# Altium PCB circuit board design v2.1.PcbDoc
Units mm, origin at the board's own origin, x right, y up, seen from the top; angles counter-clockwise.
Board outline 28.07 x 76.07 mm, 4 copper layers (F.Cu, In1.Cu, In2.Cu, B.Cu); 64 components, 83 nets, 279 pads, 132 vias.
Unrouted connection lines stored in the file: 2.
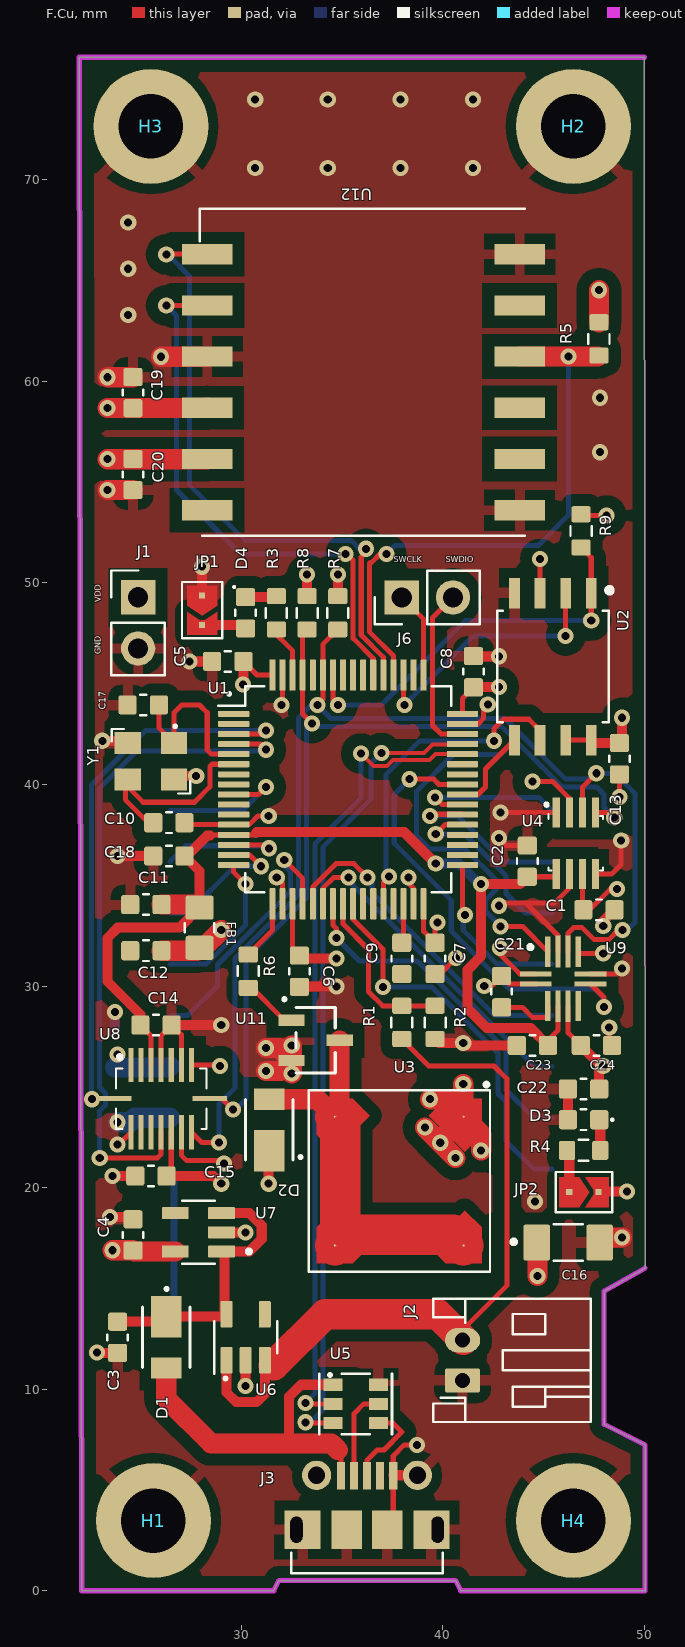
[diagram p0: F.Cu view]
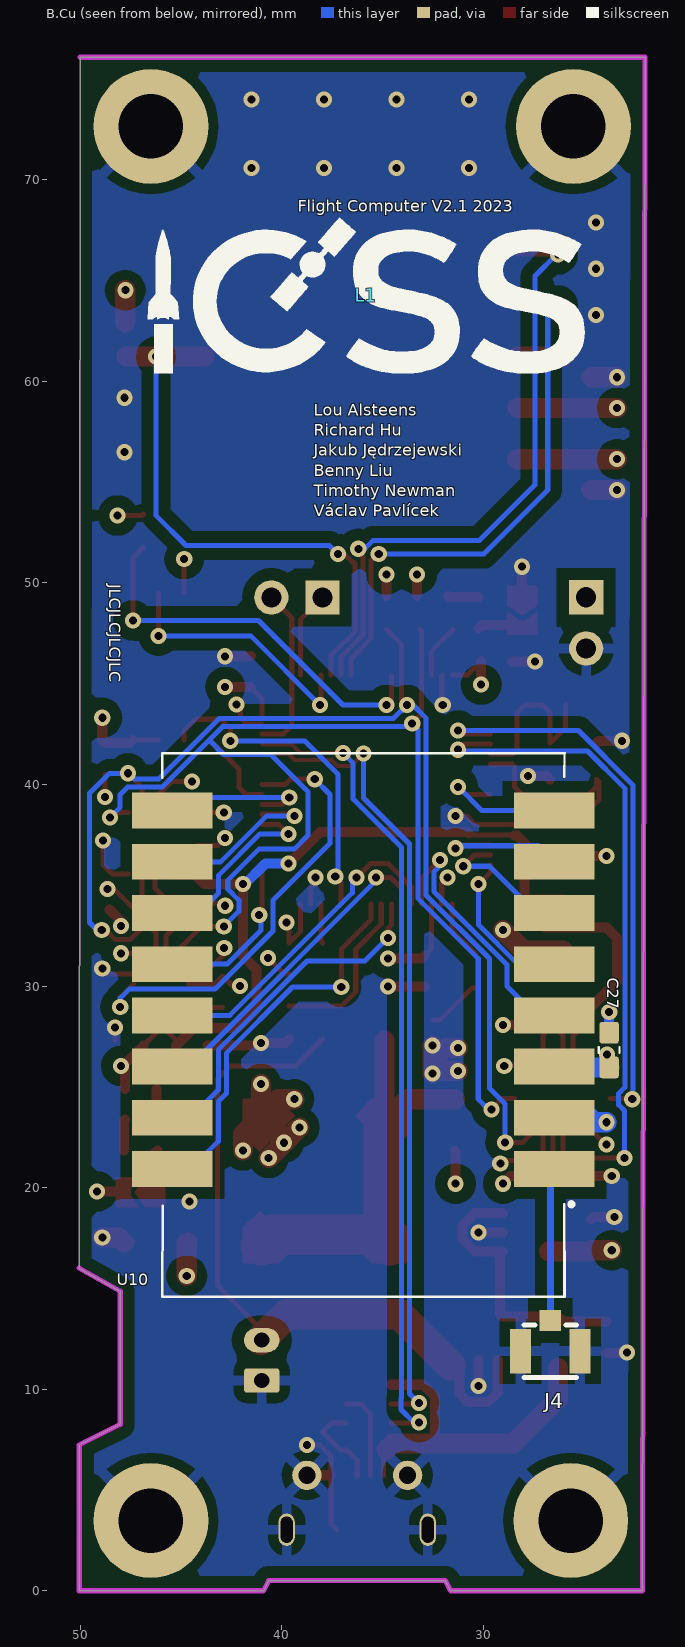
[diagram p1: B.Cu view, seen from below]
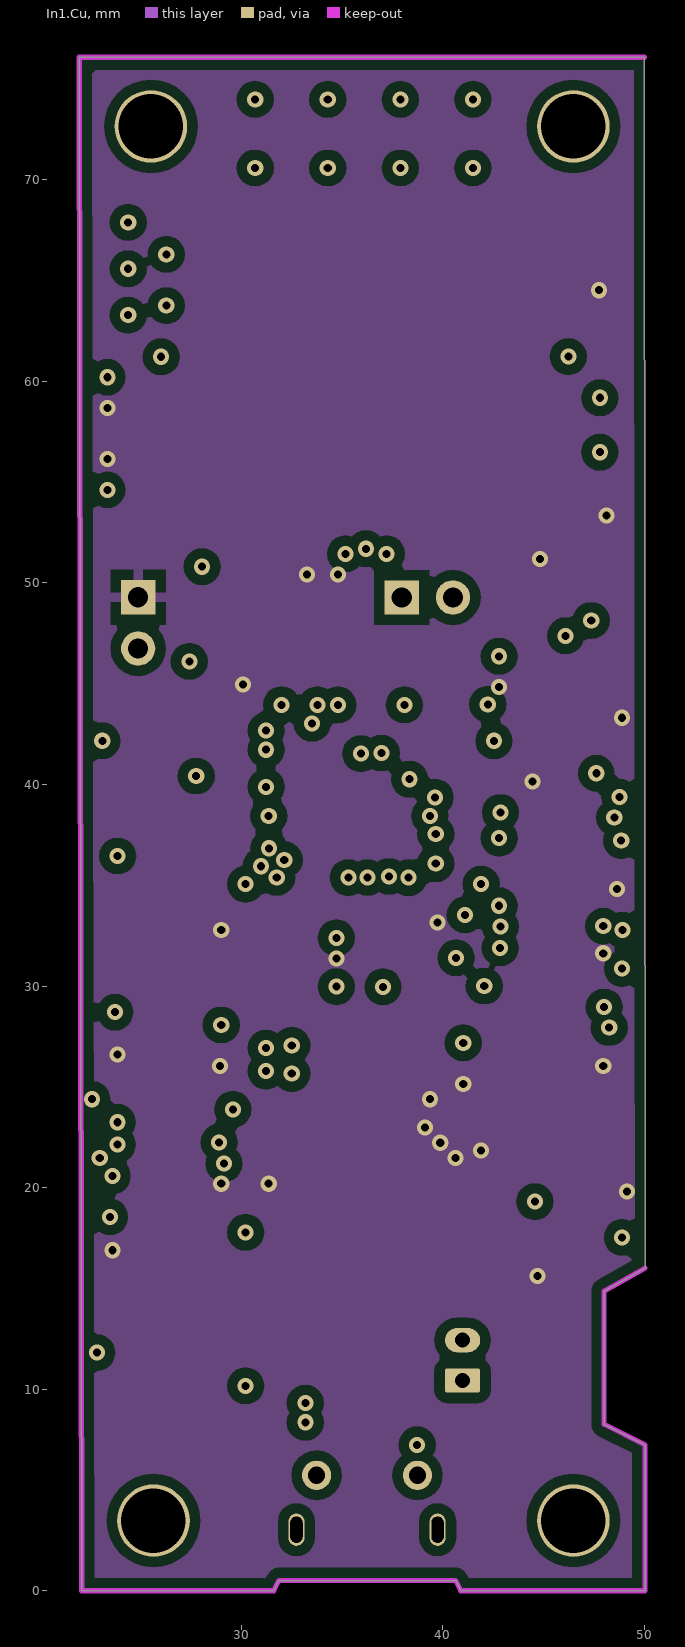
[diagram p2: In1.Cu]
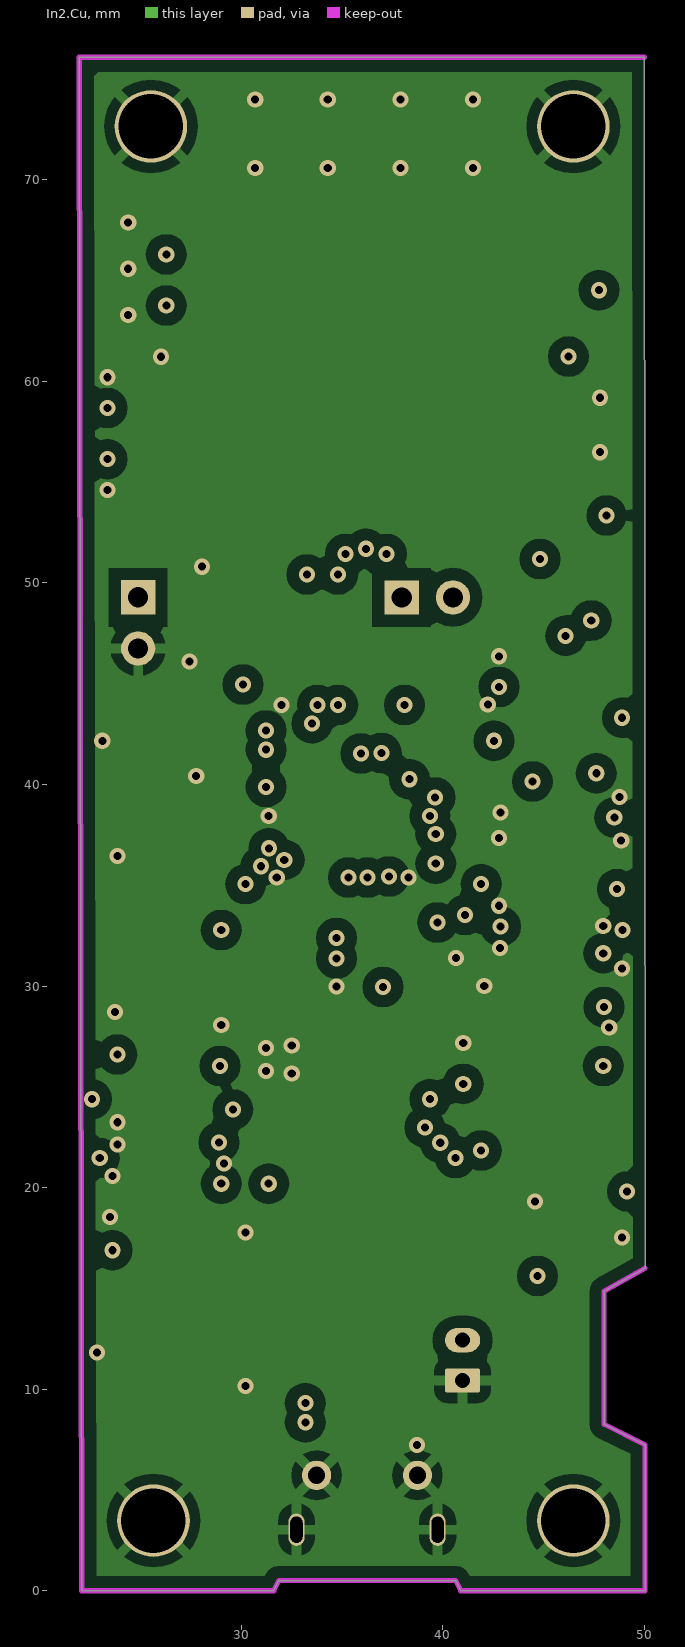
[diagram p3: In2.Cu]

## Layer stack, top to bottom
F.Mask: solder mask 0.0102, Solder Resist, Dk 3.5
F.Cu: signal copper 0.0356
Dielectric 1: dielectric 0.32, FR-4, Dk 4.8
In1.Cu: signal copper 0.0356
Dielectric2: dielectric 0.32, FR-4, Dk 4.8
In2.Cu: signal copper 0.0356
Dielectric3: dielectric 0.32, FR-4, Dk 4.8
B.Cu: signal copper 0.0356
B.Mask: solder mask 0.0102, Solder Resist, Dk 3.5

## Board outline
50.038,16.002 48.006,14.859 48.006,8.255 50.038,7.239 50.038,0 40.894,0 40.64,0.508 31.877,0.508 31.623,0 22.098,0 21.971,76.073 50,76.073 50.038,16.002

## Design rules (kind name [scope] priority, off if disabled: settings)
Clearance "Clearence 0.6_Polygon" [InNamedPolygon('F.Cu-GND') OR InNamedPolygon('In2.Cu-GND') OR InNamedPolygon('B.Cu-GND')] p1: gap=0.6 ignorepadtopadclearanceinfootprint=FALSE
Clearance "Clearence 0.508_Polygon" [InNamedPolygon('In1.Cu-+3.3V')] p2: gap=0.508 ignorepadtopadclearanceinfootprint=FALSE
MinimumSolderMaskSliver [All] p1: minsoldermaskwidth=0
PolygonConnect Polygon_In1.Cu-+3.3V_ConnectDirect [IsNamedPolygon('In1.Cu-+3.3V') vs IsVia] p1: connectstyle=Direct reliefconductorwidth=0.254 reliefentries=4 polygonreliefangle="90 Angle" airgapwidth=0.254
PolygonConnect Polygon_In1.Cu-+3.3V_ConnectRelief45 [IsNamedPolygon('In1.Cu-+3.3V') vs (IsThruPin or IsSMTPin) and (PadShape_AllLayers = 'Round')] p2: connectstyle=Relief reliefconductorwidth=0.508 reliefentries=4 polygonreliefangle="45 Angle" airgapwidth=0.508
PolygonConnect Polygon_In1.Cu-+3.3V_ConnectRelief90 [IsNamedPolygon('In1.Cu-+3.3V') vs (IsThruPin or IsSMTPin) and (PadShape_AllLayers <> 'Round')] p3: connectstyle=Relief reliefconductorwidth=0.508 reliefentries=4 polygonreliefangle="90 Angle" airgapwidth=0.508
PolygonConnect Polygon_B.Cu-GND_ConnectDirect [IsNamedPolygon('B.Cu-GND') vs IsVia] p4: connectstyle=Direct reliefconductorwidth=0.254 reliefentries=4 polygonreliefangle="90 Angle" airgapwidth=0.254
PolygonConnect Polygon_B.Cu-GND_ConnectRelief45 [IsNamedPolygon('B.Cu-GND') vs (IsThruPin or IsSMTPin) and (PadShape_AllLayers = 'Round')] p5: connectstyle=Relief reliefconductorwidth=0.508 reliefentries=4 polygonreliefangle="45 Angle" airgapwidth=0.508
PolygonConnect Polygon_B.Cu-GND_ConnectRelief90 [IsNamedPolygon('B.Cu-GND') vs (IsThruPin or IsSMTPin) and (PadShape_AllLayers <> 'Round')] p6: connectstyle=Relief reliefconductorwidth=0.508 reliefentries=4 polygonreliefangle="90 Angle" airgapwidth=0.508
PolygonConnect Polygon_In2.Cu-GND_ConnectDirect [IsNamedPolygon('In2.Cu-GND') vs IsVia] p7: connectstyle=Direct reliefconductorwidth=0.254 reliefentries=4 polygonreliefangle="90 Angle" airgapwidth=0.254
PolygonConnect Polygon_In2.Cu-GND_ConnectRelief45 [IsNamedPolygon('In2.Cu-GND') vs (IsThruPin or IsSMTPin) and (PadShape_AllLayers = 'Round')] p8: connectstyle=Relief reliefconductorwidth=0.508 reliefentries=4 polygonreliefangle="45 Angle" airgapwidth=0.508
PolygonConnect Polygon_In2.Cu-GND_ConnectRelief90 [IsNamedPolygon('In2.Cu-GND') vs (IsThruPin or IsSMTPin) and (PadShape_AllLayers <> 'Round')] p9: connectstyle=Relief reliefconductorwidth=0.508 reliefentries=4 polygonreliefangle="90 Angle" airgapwidth=0.508
PolygonConnect Polygon_F.Cu-GND_ConnectDirect [IsNamedPolygon('F.Cu-GND') vs IsVia] p10: connectstyle=Direct reliefconductorwidth=0.254 reliefentries=4 polygonreliefangle="90 Angle" airgapwidth=0.254
PolygonConnect Polygon_F.Cu-GND_ConnectRelief45 [IsNamedPolygon('F.Cu-GND') vs (IsThruPin or IsSMTPin) and (PadShape_AllLayers = 'Round')] p11: connectstyle=Relief reliefconductorwidth=0.508 reliefentries=4 polygonreliefangle="45 Angle" airgapwidth=0.508
PolygonConnect Polygon_F.Cu-GND_ConnectRelief90 [IsNamedPolygon('F.Cu-GND') vs (IsThruPin or IsSMTPin) and (PadShape_AllLayers <> 'Round')] p12: connectstyle=Relief reliefconductorwidth=0.508 reliefentries=4 polygonreliefangle="90 Angle" airgapwidth=0.508
RoutingVias [All] p1: holewidth=0.711 width=1.27 viastyle="Through Hole" minholewidth=0.711 minwidth=1.27 maxholewidth=0.711 maxwidth=1.27
SilkToSilkClearance [All] p1: silktosilkclearance=0
SilkToSolderMaskClearance [IsPad] p1: minsilkscreentomaskgap=0 clearancetoexposedcopper=TRUE
SolderMaskExpansion [All] p1: expansion=0.102 istentingtop=FALSE
Width [All] p1: maxlimit=10 minlimit=0.254 preferedwidth=0.254 midlayer2_maxwidth=0.254 minimp=50.000000 maximp=50.000000 favimp=50.000000
27 further rules are at their usual default settings.

## Components (designator, comment, footprint, x,y, rotation, side; value= is the part's Value field where it differs from the comment)
C1 "100nF" C_0603_1608Metric 47.752,33.782 r0 top
C2 "100nF" C_0603_1608Metric 44.196,36.195 r90 top
C3 "1uF" C_0603_1608Metric 23.876,12.573 r270 top
C4 "1uF" C_0603_1608Metric 24.638,17.653 r90 top
C5 "100nF" C_0603_1608Metric 29.337,46.101 r180 top
C6 "100nF" C_0603_1608Metric 32.893,30.734 r270 top
C7 "100nF" C_0603_1608Metric 39.624,31.369 r270 top
C8 "100nF" C_0603_1608Metric 41.529,45.593 r90 top
C9 "4.7uF" C_0603_1608Metric 37.973,31.369 r270 top
C10 "100nF" C_0603_1608Metric 26.416,36.449 r180 top
C11 "1uF" C_0603_1608Metric 25.273,34.036 r180 top
C12 "1uF" C_0603_1608Metric 25.273,31.75 r180 top
C13 "100nF" C_0603_1608Metric 48.768,41.275 r270 top
C14 "100nF" C_0603_1608Metric 25.781,28.067 r0 top
C15 "100nF" C_0603_1608Metric 25.527,20.574 r180 top
C16 "4.7uF Tantalum Capacitor" C_1206_3216Metric_Pad1.33x1.80mm_HandSolder 46.228,17.272 r0 top
C17 "15pF" C_0603_1608Metric 25.146,43.942 r180 top
C18 "15pF" C_0603_1608Metric 26.416,38.1 r0 top
C19 "100nF" C_0603_1608Metric 24.638,59.436 r90 top
C20 "100nF" C_0603_1608Metric 24.638,55.372 r270 top
C21 "100nF" C_0603_1608Metric 42.926,29.718 r90 top
C22 "4.7uF" C_0603_1608Metric 46.99,24.892 r180 top
C23 "100nF" C_0603_1608Metric 44.45,27.051 r180 top
C24 "100nF" C_0603_1608Metric 47.625,27.051 r0 top
C27 "100nF" C_0603_1608Metric_Pad1.08x0.95mm_HandSolder 23.749,26.823 r270 bottom
D1 "DFLS130L Schottkey Diode" PowerDI123 26.289,12.573 r90 top
D2 "DFLS130L Schottkey Diode" PowerDI123 31.399,22.86 r270 top
D3 "SML-LX0603GW-TR Green LED" C_0603_1608Metric 46.99,23.368 r0 top
D4 "SML-LX0603IW-TR Red LED" C_0603_1608Metric 30.226,48.514 r90 top
FB1 "742792025 Ferrite Bead 120R@100MHz" R_0805_2012Metric_Pad1.20x1.40mm_HandSolder 27.94,32.893 r270 top
H1 "MountingHole_Pad" MountingHole_3.2mm_M3_ISO7380_Pad_TopBottom 25.654,3.48 r0 top
H2 "MountingHole_Pad" MountingHole_3.2mm_M3_ISO7380_Pad_TopBottom 46.482,72.644 r0 top
H3 "MountingHole_Pad" MountingHole_3.2mm_M3_ISO7380_Pad_TopBottom 25.527,72.644 r0 top
H4 "MountingHole_Pad" MountingHole_3.2mm_M3_ISO7380_Pad_TopBottom 46.482,3.48 r0 top
J1 "01x02_Male_PinHeader_2.54mm" PinHeader_1x02_P2.54mm_Vertical 24.892,49.281 r0 top
J2 "JST_PH_S2B-PH-K_1x02_P2.00mm_Horizontal" JST_PH_S2B-PH-K_1x02_P2.00mm_Horizontal 40.984,10.43 r90 top
J3 "105017-0001 Micro USB Conn" MOLEX_105017-0001 36.247,3.029 r0 top
J4 "[OPTIONAL] U.FL-R-SMT-1_10_ Antenna Conn" U.FL-R-SMT-1_10_ 26.67,11.88 r0 bottom
J6 "01x02_Male_PinHeader_2.54mm" PinHeader_1x02_P2.54mm_Vertical 37.968,49.276 r90 top
JP1 "SolderJumper_2_Open" SolderJumper-2_P1.3mm_Open_TrianglePad1.0x1.5mm 28.067,48.641 r270 top
JP2 "SolderJumper_2_Open" SolderJumper-2_P1.3mm_Open_TrianglePad1.0x1.5mm 47.003,19.772 r0 top
L1 "Logo" ICSS_Logo 35.814,64.262 r0 bottom
R1 "100k" R_0603_1608Metric 37.973,28.194 r90 top
R2 "100k" R_0603_1608Metric 39.624,28.194 r270 top
R3 "100" R_0603_1608Metric 31.75,48.514 r90 top
R4 "100" R_0603_1608Metric 46.99,21.844 r180 top
R5 "4.7k" R_0603_1608Metric 47.752,62.103 r90 top
R6 "3.3k" R_0603_1608Metric 30.353,30.734 r270 top
R7 "4.7k" R_0603_1608Metric 34.798,48.514 r90 top
R8 "4.7k" R_0603_1608Metric 33.274,48.514 r90 top
R9 "4.7k" R_0603_1608Metric 46.863,52.578 r270 top
U1 "STM32F446RET6" LQFP-64_10x10mm_P0.5mm 35.306,39.751 r0 top
U2 "W25Q64JVSS 64MBit Flash Chip" W25Q64JVSSIQ 45.466,45.847 r270 top
U3 "SDR08540M3-01 SMD Buzzer" "SDR08540M3-01 Buzzer" 37.846,20.32 r0 top
U4 "BME280 Environment Sensor" Bosch_LGA-8_2.5x2.5mm_P0.65mm_ClockwisePinNumbering 46.609,37.084 r0 top
U5 "STF202-22T1G ESD/EMI Chip" STF202-22T1G 35.687,9.271 r270 top
U6 "MAX40203_SOT23 Ideal Diode" SOT-23-5 30.226,12.573 r90 top
U7 "NCP161ASN330T1G LDO" SOT95P280X145-5N 27.884,17.78 r180 top
U8 "BMI088 Inertial Measurement Unit" BMI088 26.035,24.416 r0 top
U9 "LIS3MDLTR Magnetometer" XDCR_LIS3MDLTR 45.974,30.353 r0 top
U10 "LAMBDA-9D Radio" XCVR_LAMBDA-9D 35.941,28.067 r180 bottom
U11 "2SCR512R_HZG BJT" 2SCR512RHZG 33.693,27.305 r270 top
U12 "L80-R GPS" Quectel_L80-R 36.068,60.452 r0 top
Y1 "ECS-80-8-33Q-ADS-TR3 8MHz Crystal" "ECS-80-8-33Q-ADS-TR3 Crystal" 25.527,41.148 r180 top

## Footprints (in the part's own frame and the unit in brackets; to place one, negate y for a bottom-side part, rotate by r counter-clockwise, add the part's x,y. Pads: shape width x height; smd on the part's side, far side on the other; paste and mask are expansions set on the pad)
2SCR512RHZG [mil]
  rect 22.36x51.56 smd mask+0: 1(-39.37,-47) 2(39.37,-47) 3(0,47)
  silkscreen extent -83,-64 64,39
BMI088 [mm]
  rect 0.25x1.7 smd mask+0: 1(-1.5,1.665) 2(-1,1.665) 3(-0.5,1.665) 4(0,1.665) 5(0.5,1.665) 6(1,1.665) 7(1.5,1.665) 9(1.5,-1.665) 10(1,-1.665) 11(0.5,-1.665) 12(0,-1.665) 13(-0.5,-1.665) 14(-1,-1.665) 15(-1.5,-1.665)
  rect 1.7x0.25 smd mask+0: 8(2.415,0) 16(-2.315,0)
  silkscreen extent -2.25,-1.5 2.25,2.15
Bosch_LGA-8_2.5x2.5mm_P0.65mm_ClockwisePinNumbering [mm]
  rect 0.35x1.5 smd mask+0: 1(-0.975,1.525) 2(-0.325,1.525) 3(0.325,1.525) 4(0.975,1.525) 5(0.975,-1.525) 6(0.325,-1.525) 7(-0.325,-1.525) 8(-0.975,-1.525)
  silkscreen extent -1.54,-1.36 1.35,2
C_0603_1608Metric [mm]
  rrect25% 0.9x0.95 smd mask+0: 1(-0.775,0) 2(0.775,0)
  silkscreen extent -0.14,-0.51 0.14,0.51
C_0603_1608Metric_Pad1.08x0.95mm_HandSolder [mm]
  rrect25% 1.075x0.95 smd mask+0: 1(0.863,0) 2(-0.863,0)
  silkscreen extent -0.15,-0.51 0.15,0.51
C_1206_3216Metric_Pad1.33x1.80mm_HandSolder [mm]
  rrect19% 1.325x1.8 smd mask+0: 1(-1.562,0) 2(1.562,0)
  silkscreen extent -2.82,-0.91 0.71,0.91
"ECS-80-8-33Q-ADS-TR3 Crystal" [mm]
  rect 1.3x1.1 smd mask+0: 1(-1.15,-0.9) 2(1.15,-0.9) 3(1.15,0.9) 4(-1.15,0.9)
  silkscreen extent -1.95,-1.8 1.95,1.6
ICSS_Logo [mm]
  silkscreen extent -10.84,-3.85 10.83,3.87
JST_PH_S2B-PH-K_1x02_P2.00mm_Horizontal [mm]
  rrect21% 1.2x1.75 hole 0.75 paste-1.75 mask+0: 1(0,0)
  rrect100% 1.2x1.75 hole 0.75 paste-1.75 mask+0: 2(2,0)
  silkscreen extent -2.06,-6.36 4.06,1.46
LQFP-64_10x10mm_P0.5mm [mm]
  rrect25% 1.55x0.3 smd mask+0: 1(-5.675,3.75) 2(-5.675,3.25) 3(-5.675,2.75) 4(-5.675,2.25) 5(-5.675,1.75) 6(-5.675,1.25) 7(-5.675,0.75) 8(-5.675,0.25) 9(-5.675,-0.25) 10(-5.675,-0.75) 11(-5.675,-1.25) 12(-5.675,-1.75) 13(-5.675,-2.25) 14(-5.675,-2.75) 15(-5.675,-3.25) 16(-5.675,-3.75) 33(5.675,-3.75) 34(5.675,-3.25) 35(5.675,-2.75) 36(5.675,-2.25) 37(5.675,-1.75) 38(5.675,-1.25) 39(5.675,-0.75) 40(5.675,-0.25) 41(5.675,0.25) 42(5.675,0.75) 43(5.675,1.25) 44(5.675,1.75) 45(5.675,2.25) 46(5.675,2.75) 47(5.675,3.25) 48(5.675,3.75)
  rrect25% 0.3x1.55 smd mask+0: 17(-3.75,-5.675) 18(-3.25,-5.675) 19(-2.75,-5.675) 20(-2.25,-5.675) 21(-1.75,-5.675) 22(-1.25,-5.675) 23(-0.75,-5.675) 24(-0.25,-5.675) 25(0.25,-5.675) 26(0.75,-5.675) 27(1.25,-5.675) 28(1.75,-5.675) 29(2.25,-5.675) 30(2.75,-5.675) 31(3.25,-5.675) 32(3.75,-5.675) 49(3.75,5.675) 50(3.25,5.675) 51(2.75,5.675) 52(2.25,5.675) 53(1.75,5.675) 54(1.25,5.675) 55(0.75,5.675) 56(0.25,5.675) 57(-0.25,5.675) 58(-0.75,5.675) 59(-1.25,5.675) 60(-1.75,5.675) 61(-2.25,5.675) 62(-2.75,5.675) 63(-3.25,5.675) 64(-3.75,5.675)
  silkscreen extent -6.45,-5.11 5.11,5.11
MOLEX_105017-0001 [mm]
  rect 0.4x1.35 smd mask+0: 1(-1.3,2.675) 2(-0.65,2.675) 3(0,2.675) 4(0.65,2.675) 5(1.3,2.675)
  round 1.45 hole 0.85 paste-1.45 mask+0: P$1(-2.5,2.7) P$2(2.5,2.7)
  rect 1.5x1.9 smd mask+0: P$8(-1,0) P$9(1,0)
  rect 1.8x1.9 smd mask+0: P$10(-3.2,0) P$11(3.2,0)
  rrect100% 0.8x1.6 hole 1.3 slot 0.6 at 0 deg paste-1.6 mask+0: P$12(-3.5,0) P$13(3.5,0)
  silkscreen extent -3.75,-2.15 3.75,-1.15
MountingHole_3.2mm_M3_ISO7380_Pad_TopBottom [mm]
  round 3.6 hole 3.2 paste-3.6 mask+0: 1(0,0)
  round 5.7 smd far side paste-5.7 mask+0: 1(0,0)
  round 5.7 smd paste-5.7 mask+0: 1(0,0)
PinHeader_1x02_P2.54mm_Vertical [mm]
  rect 1.7x1.7 hole 1 paste-1.7 mask+0: 1(0,0)
  rrect100% 1.7x1.7 hole 1 paste-1.7 mask+0: 2(0,-2.54)
  silkscreen extent -1.33,-3.87 1.33,1.33
PowerDI123 [mm]
  rect 2.05x1.5 smd mask+0: 1(1.025,0)
  rect 1.05x1.5 smd mask+0: 2(-1.525,0)
  silkscreen extent -1.5,-1.17 2.48,1.17
Quectel_L80-R [mm]
  rect 2.5x1 smd mask+0: 1(-7.75,5.85) 2(-7.75,3.31) 3(-7.75,0.77) 4(-7.75,-1.77) 5(-7.75,-4.31) 6(-7.75,-6.85) 7(7.75,-6.85) 8(7.75,-4.31) 9(7.75,-1.77) 10(7.75,0.77) 11(7.75,3.31) 12(7.75,5.85)
  silkscreen extent -8.11,-8.11 8,8.11
R_0603_1608Metric [mm]
  rrect25% 0.8x0.95 smd mask+0: 1(-0.825,0) 2(0.825,0)
  silkscreen extent -0.24,-0.52 0.24,0.52
R_0805_2012Metric_Pad1.20x1.40mm_HandSolder [mm]
  rrect21% 1.2x1.4 smd mask+0: 1(-1,0) 2(1,0)
  silkscreen extent -0.23,-0.73 0.23,0.73
"SDR08540M3-01 Buzzer" [mm]
  rect 0.1x0.1 smd rot 135 mask+0: 1(3.19,3.19) 3(-3.19,-3.19)
  rect 0.1x0.1 smd rot 45 mask+0: 2(-3.19,3.19) 4(3.19,-3.19)
  F.Cu region: 4.081,-2.299 4.081,-4.081 2.299,-4.081 1.465,-3.247 3.247,-1.465
  F.Cu region: -1.465,-3.247 -2.299,-4.081 -4.081,-4.081 -4.081,-2.299 -3.247,-1.465
  F.Cu region: -1.465,3.247 -3.247,1.465 -4.081,2.299 -4.081,4.081 -2.299,4.081
  F.Cu region: 4.081,2.299 3.247,1.465 1.465,3.247 2.299,4.081 4.081,4.081
  silkscreen extent -4.5,-4.5 4.5,4.88
SolderJumper-2_P1.3mm_Open_TrianglePad1.0x1.5mm [mm]
  rect 0.3x0.3 smd paste-0.3 mask+0: 1(-0.725,0) 2(0.725,0)
  F.Cu region: 1.225,-0.75 0.075,-0.75 0.575,0 0.075,0.75 1.225,0.75
  F.Cu region: 0.275,0 -0.225,-0.75 -1.225,-0.75 -1.225,0.75 -0.225,0.75
  silkscreen extent -1.4,-1 1.4,1
SOT95P280X145-5N [mm]
  rrect7% 1.32x0.59 smd mask+0: 1(-1.145,0.95) 2(-1.145,0) 3(-1.145,-0.95) 4(1.145,-0.95) 5(1.145,0.95)
  silkscreen extent -2.6,-1.57 0.8,1.57
SOT-23-5 [mm]
  rrect25% 1.325x0.6 smd mask+0: 1(-1.138,0.95) 2(-1.138,0) 3(-1.138,-0.95) 4(1.138,-0.95) 5(1.138,0.95)
  silkscreen extent -2.05,-1.56 0.8,1.56
STF202-22T1G [mm]
  rect 0.6x0.95 smd mask+0: 1(-0.95,-1.125) 2(0,-1.125) 3(0.95,-1.125) 4(0.95,1.125) 5(0,1.125) 6(-0.95,1.125)
  silkscreen extent -1.5,-1.8 1.5,1.8
U.FL-R-SMT-1_10_ [mm]
  rect 1.05x2.2 smd mask+0: 1(1.475,0) 2(-1.475,0)
  rect 1.05x1.05 smd mask+0: 3(0,-1.525)
  silkscreen extent -1.3,-1.3 1.3,1.3
W25Q64JVSSIQ [mil]
  rect 59.56x20.97 smd mask+0: 1(-143.5,75) 2(-143.5,25) 3(-143.5,-25) 4(-143.5,-75) 5(143.5,-75) 6(143.5,-25) 7(143.5,25) 8(143.5,75)
  silkscreen extent -154,-109 109,116
XCVR_LAMBDA-9D [mm]
  rect 4x1.78 smd paste-4 mask+0: 1(9.475,-7.145)
  rect 4x1.78 smd mask+0: 2(9.475,-4.605) 3(9.475,-2.065) 4(9.475,0.475) 5(9.475,3.015) 6(9.475,5.555) 7(9.475,8.095) 8(9.475,10.635) 9(-9.475,10.635) 10(-9.475,8.095) 11(-9.475,5.555) 12(-9.475,3.015) 13(-9.475,0.475) 14(-9.475,-2.065) 15(-9.475,-4.605) 16(-9.475,-7.145)
  silkscreen extent -9.97,-13.47 10.42,13.47
XDCR_LIS3MDLTR [mm]
  rect 0.275x1.5 smd mask+0: 1(-0.763,1.35) 4(-0.763,-1.35) 7(0.763,-1.35) 10(0.763,1.35)
  rect 1.575x0.25 smd mask+0: 2(-1.362,0.25) 3(-1.362,-0.25) 8(1.362,-0.25) 9(1.362,0.25)
  rect 0.25x1.575 smd mask+0: 5(-0.25,-1.362) 6(0.25,-1.362) 11(0.25,1.362) 12(-0.25,1.362)
  silkscreen extent -1.73,1.48 -1.53,1.68

## Part data
C1 C2 C3 C4 C5 C6 C7 C8 C9 C10 C11 C12 C13 C14 C15 C17 C18 C19 C20 C21 C22 C23 C24 D3 D4: library part C_0603_1608Metric, "Capacitor SMD 0603 (1608 Metric), square (rectangular) end terminal, IPC_7351 nominal, (Body size source: IPC-SM-782 page 76, https://www.pcb-3d.com/wordpress/wp-content/uploads/ipc-sm-782a_amendment_1_and_2.pdf), generated with kicad-footprint-generator"
  C1 C2 C14 C15 C21 C23 C24: Sheetfile="File: sensors.kicad_sch", Sheetname=Sensors
  C3 C4: Sheetfile="File: power_supply.kicad_sch", Sheetname=Power
  C5 C6 C7 C8 C9 C10 C11 C12 C13 C17 C18 C22 D3 D4: Sheetfile="File: mcu_stm32.kicad_sch", Sheetname=MCU
  C19 C20: Sheetfile="File: gps.kicad_sch", Sheetname=GPS
C16: library part C_1206_3216Metric_Pad1.33x1.80mm_HandSolder, "Capacitor SMD 1206 (3216 Metric), square (rectangular) end terminal, IPC_7351 nominal with elongated pad for handsoldering. (Body size source: IPC-SM-782 page 76, https://www.pcb-3d.com/wordpress/wp-content/uploads/ipc-sm-782a_amendment_1_and_2.pdf), generated with kicad-footprint-generator", Sheetfile="File: power_supply.kicad_sch", Sheetname=Power
C27: library part C_0603_1608Metric_Pad1.08x0.95mm_HandSolder, "Capacitor SMD 0603 (1608 Metric), square (rectangular) end terminal, IPC_7351 nominal with elongated pad for handsoldering. (Body size source: IPC-SM-782 page 76, https://www.pcb-3d.com/wordpress/wp-content/uploads/ipc-sm-782a_amendment_1_and_2.pdf), generated with kicad-footprint-generator", Sheetfile="File: mcu_stm32.kicad_sch", Sheetname=MCU
D1 D2: library part PowerDI123
  D1: Sheetfile="File: power_supply.kicad_sch", Sheetname=Power
  D2: Sheetfile="File: mcu_stm32.kicad_sch", Sheetname=MCU
FB1: library part R_0805_2012Metric_Pad1.20x1.40mm_HandSolder, "Resistor SMD 0805 (2012 Metric), square (rectangular) end terminal, IPC_7351 nominal with elongated pad for handsoldering. (Body size source: IPC-SM-782 page 72, https://www.pcb-3d.com/wordpress/wp-content/uploads/ipc-sm-782a_amendment_1_and_2.pdf), generated with kicad-footprint-generator", Sheetfile="File: mcu_stm32.kicad_sch", Sheetname=MCU
H1 H2 H3 H4: library part MountingHole_3.2mm_M3_ISO7380_Pad_TopBottom, "Mounting Hole 3.2mm, M3, ISO7380", Sheetfile="File: mcu_stm32.kicad_sch", Sheetname=MCU
J1 J6: library part PinHeader_1x02_P2.54mm_Vertical, "Through hole straight pin header, 1x02, 2.54mm pitch, single row", Sheetfile="File: mcu_stm32.kicad_sch", Sheetname=MCU
J2: "JST PH series connector, S2B-PH-K (http://www.jst-mfg.com/product/pdf/eng/ePH.pdf), generated with kicad-footprint-generator", Sheetfile="File: power_supply.kicad_sch", Sheetname=Power
J3: library part MOLEX_105017-0001, Sheetfile="File: power_supply.kicad_sch", Sheetname=Power
J4: library part U.FL-R-SMT-1_10_, "U.FL-R-SMT-1(10)", Manufacturer_Name=Hirose, Mouser Part Number=798-U.FL-R-SMT-110, Arrow Part Number=U.FL-R-SMT-1(10), Arrow Price/Stock=https://www.arrow.com/en/products/u.fl-r-smt-1-10/hirose-electric, Manufacturer_Part_Number=U.FL-R-SMT-1(10), Mouser Price/Stock=https://www.mouser.co.uk/ProductDetail/Hirose-Connector/U.FL-R-SMT-110?qs=kL1ClTr6oBoOdtqlGQpQrQ%3D%3D, Sheetfile="File: mcu_stm32.kicad_sch", Sheetname=MCU
JP1 JP2: library part SolderJumper-2_P1.3mm_Open_TrianglePad1.0x1.5mm, "SMD Solder Jumper, 1x1.5mm Triangular Pads, 0.3mm gap, open", Sheetfile="File: mcu_stm32.kicad_sch", Sheetname=MCU
L1: library part ICSS_Logo, Sheetfile="File: circuit board design v2.1.kicad_sch"
R1 R2 R3 R4 R5 R6 R7 R8 R9: library part R_0603_1608Metric, "Resistor SMD 0603 (1608 Metric), square (rectangular) end terminal, IPC_7351 nominal, (Body size source: IPC-SM-782 page 72, https://www.pcb-3d.com/wordpress/wp-content/uploads/ipc-sm-782a_amendment_1_and_2.pdf), generated with kicad-footprint-generator"
  R1 R2: Sheetfile="File: power_supply.kicad_sch", Sheetname=Power
  R3 R4 R6 R7 R8 R9: Sheetfile="File: mcu_stm32.kicad_sch", Sheetname=MCU
  R5: Sheetfile="File: gps.kicad_sch", Sheetname=GPS
U1: library part LQFP-64_10x10mm_P0.5mm, "LQFP, 64 Pin (https://www.analog.com/media/en/technical-documentation/data-sheets/ad7606_7606-6_7606-4.pdf), generated with kicad-footprint-generator ipc_gullwing_generator.py", Sheetfile="File: mcu_stm32.kicad_sch", Sheetname=MCU
U2: library part W25Q64JVSSIQ, Sheetfile="File: mcu_stm32.kicad_sch", Sheetname=MCU
U3: library part "SDR08540M3-01 Buzzer", Sheetfile="File: mcu_stm32.kicad_sch", Sheetname=MCU
U4: library part Bosch_LGA-8_2.5x2.5mm_P0.65mm_ClockwisePinNumbering, "LGA-8", Sheetfile="File: sensors.kicad_sch", Sheetname=Sensors
U5: library part STF202-22T1G, Sheetfile="File: power_supply.kicad_sch", Sheetname=Power
U6: library part SOT-23-5, "SOT, 5 Pin (https://www.jedec.org/sites/default/files/docs/Mo-178c.PDF variant AA), generated with kicad-footprint-generator ipc_gullwing_generator.py", Sheetfile="File: power_supply.kicad_sch", Sheetname=Power
U7: library part SOT95P280X145-5N, MANUFACTURER=Onsemi, MAXIMUM_PACKAGE_HEIGHT="1.45 mm", PARTREV="Rev. 18", SNAPEDA_PN=NCP161ASN180T1G, STANDARD=IPC-7351B, Sheetfile="File: power_supply.kicad_sch", Sheetname=Power
U8: library part BMI088, "BMI088-2", Manufacturer_Name=BOSCH, Mouser Part Number=262-BMI088, Arrow Part Number=BMI088, Arrow Price/Stock=https://www.arrow.com/en/products/bmi088/bosch?region=europe, Description="Inertial Measurement Unit Digital Output 2.5V/3.3V Automotive", Height=1.45, Manufacturer_Part_Number=BMI088, Mouser Price/Stock=https://www.mouser.co.uk/ProductDetail/Bosch-Sensortec/BMI088?qs=f9yNj16SXrIMFspTV6RB6Q%3D%3D, Sheetfile="File: sensors.kicad_sch", Sheetname=Sensors
U9: library part XDCR_LIS3MDLTR, MAXIMUM_PACKAGE_HEIGHT=1mm, PACKAGE="VFLGA-12 STMicroelectronics", AVAILABILITY=Unavailable, Description="LIS3MDL Series 3 Axis ±2/±8/±12/±16 g 3.6V High Performance Magnetometer LGA-12", MF=STMicroelectronics, MP=LIS3MDLTR, PARTREV=6, PRICE=None, STANDARD="Manufacturer Recommendation", Sheetfile="File: sensors.kicad_sch", Sheetname=Sensors
U10: library part XCVR_LAMBDA-9D, MANUFACTURER="RF Solutions", MAXIMUM_PACKAGE_HEIGHT="5.81 mm", SNAPEDA_PACKAGE_ID=63698, PARTREV=N/A, SNAPEDA_PN=LAMBDA-9D, STANDARD="Manufacturer Recommendations", Sheetfile="File: mcu_stm32.kicad_sch", Sheetname=MCU
U11: library part 2SCR512RHZG, Sheetfile="File: mcu_stm32.kicad_sch", Sheetname=MCU
U12: library part Quectel_L80-R, "Quectel L80-R GPS Module, Patch on Top, https://www.quectel.com/UploadImage/Downlad/Quectel_L80-R_Hardware_Design_V1.2.pdf", Sheetfile="File: gps.kicad_sch", Sheetname=GPS
Y1: library part "ECS-80-8-33Q-ADS-TR3 Crystal", Sheetfile="File: mcu_stm32.kicad_sch", Sheetname=MCU

## Via types
v1: diameter 0.8, hole 0.4, F.Cu to B.Cu, tented both sides, 132 vias

## Nets (pads, with @x,y where several pads share a name; then routed paths per layer and width w, separated by ;. In a path a pad name is that pad's centre, name@x,y a point inside that pad or via, vN(x,y) a via of type N, cw(c..) or ccw(c..) an arc to the next point about the centre after c; other vN are vias at no path point)
+3.3V: C1.1 C4.1 C5.1 C6.1 C7.1 C8.1 C12.1 C13.1 C15.1 C16.1 C19.1 C20.1 C22.1 C24.1 C27.1 D2.1 FB1.2 J1.1 JP2.2 R5.2 R7.2 R8.2 R9.1 U1.19 U1.32 U1.48 U1.64 U2.3 U2.7 U2.8 U3.1 U4.2 U4.6 U7.5 U8.7 U8.11 U9.6 U9.10 U10.3 U12.4 U12.5 | length 78.3
  F.Cu w0.25: C15.1@26.289,20.574 26.535,20.82 U8.11 ; U8.7 28.91,26.081 v1(28.956,26.035) ; FB1.2@27.797,31.75 FB1.2 FB1.2@28.134,31.893 ; C5.1 30.787,45.426 U1.64 ; U1.19 32.556,31.846 C6.1 ; U1.32 39.056,32.712 C7.1 39.624,33.02 v1(39.751,33.147) ; U1.48 40.981,44.27 C8.1 ; v1(44.45,40.142) 45.456,40.142 46.284,39.314 U4.2 ; U2.3 v1(44.831,51.181) ; U2.7 U2.8 ; U9.6 46.224,27.677 C24.1 ; U9.10 46.817,31.623 v1(47.966,31.623) ; R9.1 46.926,53.34 v1(48.133,53.34) ; U4.6 46.934,33.825 C1.1 47.282,33.782 48.306,34.806 v1(48.641,34.806)
  F.Cu w0.5: C19.1@24.638,58.788 C19.1@24.744,58.682 ; C15.1@26.289,20.574 28.635,20.574 v1(29.016,20.193) ; v1(30.099,44.958) 30.112,44.971 C5.1 ; v1(31.369,20.193) 31.369,21.805 D2.1 ; C6.1 33.033,31.369 v1(34.729,31.369) ; R8.2 v1(33.274,50.419) ; R7.2 v1(34.798,50.419) ; C8.1 41.542,44.831 v1(42.799,44.831) ; C24.1 47.866,26.035 v1(47.966,26.035) 47.765,25.834 C22.1 ; U2.8 47.523,42.05 C13.1 48.895,42.177 v1(48.895,43.307) ; JP2.2 47.768,19.812 v1(49.149,19.812)
  F.Cu w1: v1(23.368,56.134) 28.31,56.134 U12.5 ; v1(23.368,58.674) 28.31,58.674 U12.4 ; v1(23.622,16.891) 24.625,16.891 C4.1 ; C4.1@24.638,16.891 24.699,16.83 U7.5 ; C12.1 FB1.2@27.797,31.75 ; FB1.2@28.134,31.893 v1(29.016,32.774) ; v1(39.116,22.987) v1(39.878,22.225) ; v1(39.37,24.384) 40.162,24.384 U3.1 ; v1(40.64,21.463) v1(39.878,22.225) ; v1(41.021,25.146) 41.021,23.525 U3.1 ; v1(41.91,21.844) 41.91,22.636 U3.1 ; C16.1 44.704,17.234 v1(44.704,15.621) ; R5.2 v1(47.752,64.516) ; v1(39.878,22.225) 39.878,22.352 U3.1
  B.Cu w0.5: C27.1 23.749,26.488 v1(23.86,26.599)
  B.Cu w1: C27.1 26.425,25.961 U10.3
+3.3VA: C2.1 C10.1 C11.1 C14.1 C23.1 FB1.1 U1.13 U4.8 U8.3 U9.5 | length 50.6
  F.Cu w0.25: C14.1 25.535,27.538 U8.3 ; 28.448,37.465 28.484,37.501 U1.13 30.643,37.501 30.734,37.592 ; C2.1 45.495,35.42 U4.8 ; C23.1@45.225,27.305 45.724,27.804 U9.5
  F.Cu w0.5: C14.1 25.006,28.588 23.368,30.226 23.368,32.385 23.876,32.893 26.94,32.893 FB1.1 27.94,35.7 C10.1 27.305,36.449 28.321,37.465 28.448,37.465 ; 30.734,37.592 30.773,37.631 38.093,37.631 v1(39.656,36.068) ; C2.1 43.828,35.052 v1(41.91,35.052) 41.91,31.484 41.237,30.811 41.237,28.867 42.178,27.926 44.35,27.926 C23.1
  F.Cu w1: C11.1 27.797,34.036 FB1.1
  B.Cu w0.25: v1@41.91,34.964 v1(41.91,35.052)
  B.Cu w0.5: v1(39.656,36.068) 40.806,36.068 v1@41.91,34.964
Acc_Int1: U1.3 U8.16 | length 28.2
  F.Cu w0.25: v1(22.606,24.384) 22.638,24.416 U8.16 ; U1.3 31.071,42.501 v1(31.242,42.672)
  B.Cu w0.25: v1(22.606,24.384) 22.574,24.416 22.574,39.973 25.273,42.672 v1(31.242,42.672)
Battery+: J2.2 R1.1 U6.1 U6.3 | length 36.4
  F.Cu w0.25: R1.1 39.307,26.035 42.545,26.035 43.18,25.4 43.18,15.134 41.021,12.975 J2.2@41.021,12.446
  F.Cu w0.5: U6.1 29.276,9.84 29.756,9.36 30.774,9.36 31.176,9.762 U6.3
  F.Cu w1.5: 31.623,11.176 34.163,13.716 39.751,13.716 J2.2@41.021,12.446
Battery_Voltage: R1.2 R2.1 U1.24 | length 8.5
  F.Cu w0.25: U1.24 35.056,33.082 36.322,31.816 36.322,29.718 37.021,29.019 R1.2 R2.1
Buzzer_Gate: R6.1 U1.17 | length 3
  F.Cu w0.25: R6.1 31.556,32.762 U1.17
D+: J3.3 U5.4 | length 4.4
  F.Cu w0.25: J3.3 36.247,6.479 36.753,6.985 37.084,6.985 37.973,7.874 37.526,8.321 U5.4
D-: J3.2 U5.5 | length 4.5
  F.Cu w0.25: J3.2 35.597,8.781 36.087,9.271 U5.5
Flash_QUADSPI_BK1_IO0: U1.40 U2.5 | length 4.2
  F.Cu w0.25: U1.40 41.751,39.501 42.124,39.874 42.124,40.765 U2.5
Flash_QUADSPI_BK1_IO1: U1.51 U2.2 | length 13
  F.Cu w0.25: U1.51 38.056,43.986 v1(38.1,43.942) ; v1(46.101,47.371) U2.2
  B.Cu w0.25: v1(38.1,43.942) 41.529,47.371 v1(46.101,47.371)
Flash_QUADSPI_BK1_NCS: R9.2 U1.58 U2.1 | length 19.7
  F.Cu w0.25: U1.58 34.556,44.184 v1(34.798,43.942) ; R9.2 47.371,51.245 U2.1 v1(47.371,48.133)
  B.Cu w0.25: v1(34.798,43.942) 36.957,43.942 41.148,48.133 v1(47.371,48.133)
Flash_QUADSPI_CLK: U1.28 U2.6 | length 16.4
  F.Cu w0.25: U1.28 37.056,35.151 v1(37.338,35.433) ; v1(42.545,42.164) 42.545,42.759 43.02,43.234 44.269,43.234 44.831,42.672 U2.6
  B.Cu w0.25: v1(37.338,35.433) 37.198,35.573 37.198,40.5 38.862,42.164 v1(42.545,42.164)
GND: C1.2 C2.2 C3.2 C4.2 C5.2 C6.2 C7.2 C8.2 C9.2 C10.2 C11.2 C12.2 C13.2 C14.2 C15.2 C16.2 C17.2 C18.2 C19.2 C20.2 C21.2 C22.2 C23.2 C24.2 C27.2 D3.1 H1.1 H2.1 H3.1 H4.1 J1.2 J2.1 J3.5 J3.P$1 J3.P$2 J3.P$8 J3.P$9 J3.P$10 J3.P$11 J3.P$12 J3.P$13 J4.1 J4.2 JP1.1 R2.2 U1.12 U1.18 U1.31 U1.47 U1.63 U2.4 U4.1 U4.5 U4.7 U5.6 U6.2 U7.2 U8.4 U8.6 U8.10 U8.15 U9.2 U9.3 U9.9 U9.12 U10.2 U11.2 U12.3 U12.7 U12.12 Y1.2 Y1.4 | length 89.7
  F.Cu w0.25: v1(22.86,11.811) v1@22.873,11.798 ; v1(23.876,22.137) 23.921,22.137 U8.15 ; U8.4 26.035,27.546 C14.2 27.035,27.588 U8.6 ; U8.10 27.035,21.606 27.305,21.336 29.003,21.336 v1(29.15,21.189) ; C18.2 27.29,38.001 U1.12 30.401,38.001 30.831,38.431 v1(31.369,38.431) ; v1(31.768,35.385) 32.056,35.097 U1.18 ; v1(32.004,43.942) 32.056,43.994 U1.63 ; J3.P$9 37.547,3.329 J3.5 ; J3.5@37.572,5.729 J3.5 ; v1(38.312,35.374) 38.312,35.09 38.556,34.846 U1.31 ; v1(38.735,7.239) 38.1,7.239 37.547,6.686 J3.5 ; C7.2 39.865,30.594 v1(40.667,31.396) ; U1.47 41.751,43.001 42.031,43.281 42.031,43.762 v1(42.238,43.969) ; v1(42.063,29.999) 42.432,29.999 C21.2 43.316,30.103 U9.3 ; v1(42.797,33.981) 42.941,34.125 44.107,34.125 ; v1(42.799,37.338) 43.167,36.97 C2.2 ; v1(42.847,31.894) 42.847,31.575 43.819,30.603 U9.2 ; v1(42.866,38.608) v1(42.866,38.608) U4.1 ; U9.12 45.724,32.508 44.107,34.125 ; U4.7 46.284,34.854 45.555,34.125 44.107,34.125 ; U9.9 48.637,30.603 v1(48.895,30.861) ; U4.5 48.386,35.559 48.856,36.029 v1(48.856,37.211) ; v1(48.26,27.94) 48.26,27.318 C24.2@48.273,27.305 ; v1(48.768,39.37) C13.2
  F.Cu w0.5: v1@22.873,11.798 C3.2 ; v1(23.114,42.164) 24.261,42.164 Y1.2 ; v1(23.495,18.542) 24.524,18.542 C4.2 ; v1(23.622,20.574) C15.2 ; v1(23.876,36.449) C10.2 ; C14.2 v1(29.016,28.067) ; Y1.4 26.846,40.417 v1(27.774,40.417) ; v1(27.432,46.101) C5.2 ; JP1.1 v1(28.067,50.8) ; U7.2 v1(30.226,17.78) ; v1(30.226,10.16) U6.2 ; C6.2 32.906,29.972 v1(34.729,29.972) ; J3.5@37.572,5.729 J3.P$2 ; R2.2 39.815,27.178 v1(41.021,27.178) 41.148,27.051 C23.2 ; C8.2 41.542,46.355 v1(42.799,46.355) ; D3.1 C22.2 ; v1(47.966,32.972) 47.966,33.221 C1.2
  F.Cu w1: v1(23.368,54.61) 24.625,54.61 C20.2 ; v1(23.368,60.198) 24.625,60.198 C19.2 ; v1(26.035,61.214) 28.31,61.214 U12.3 U12.3@28.326,61.214 ; v1(31.242,25.781) 31.975,25.781 U11.2 ; v1(31.242,26.924) 31.88,26.924 U11.2 ; v1(32.512,25.654) 32.512,26.292 U11.2 ; v1(32.512,27.051) 32.512,26.318 U11.2 ; C16.2 48.044,17.526 v1(48.895,17.526)
  B.Cu w0.5: C27.2 v1(23.749,28.702)
  B.Cu w1: v1(23.876,23.241) 24.493,23.241 24.714,23.462 U10.2
  other v1: 44.577,19.304 47.8,56.48 47.8,59.18 24.4,63.28 24.4,65.58 24.4,67.88 30.7,70.58 34.3,70.58 37.9,70.58 41.5,70.58 30.7,73.98 34.3,73.98 37.9,73.98 41.5,73.98
GPS_Reset: R5.1 U1.52 U12.10 | length 28.7
  F.Cu w0.25: v1(37.211,51.435) 36.87,51.435 36.87,51.409 36.475,51.014 36.409,51.014 36.36,50.965 36.36,47.575 37.556,46.379 U1.52
  F.Cu w0.5: R5.1@47.696,61.222 R5.1
  F.Cu w1: U12.10 v1(46.236,61.222) R5.1@47.696,61.222
  B.Cu w0.25: v1(37.211,51.435) 37.632,51.856 44.744,51.856 46.236,53.348 v1(46.236,61.222)
GPS_UART_RX_Module: U1.53 U12.1 | length 30.9
  F.Cu w0.25: v1(26.289,66.294) 26.297,66.302 U12.1 ; v1(36.195,51.689) 36.195,51.52 35.96,51.285 35.96,47.41 37.056,46.314 U1.53
  B.Cu w0.25: v1(26.289,66.294) 26.355,66.294 27.432,65.217 27.432,54.864 30.186,52.11 35.459,52.11 35.854,51.715 35.854,51.689 v1(36.195,51.689)
GPS_UART_TX_Module: U1.54 U12.2 | length 27.7
  F.Cu w0.25: v1(26.289,63.754) 26.297,63.762 U12.2 ; v1(35.179,51.435) 35.245,51.435 35.56,51.12 35.56,47.244 36.556,46.248 U1.54
  B.Cu w0.25: v1(26.289,63.754) 26.797,63.246 26.797,54.61 29.972,51.435 v1(35.179,51.435)
Gyro_Int3: U1.4 U8.12 | length 33.6
  F.Cu w0.25: v1(22.987,21.463) 25.846,21.463 26.035,21.652 U8.12 ; U1.4 30.963,42.001 v1(31.242,41.722)
  B.Cu w0.25: v1(22.987,21.463) 22.987,23.81 23.281,24.104 23.281,24.664 22.974,24.971 22.974,39.807 24.823,41.656 31.176,41.656 v1(31.242,41.722)
I2C1_SCL: R8.1 U1.61 U4.4 U8.8 U9.1 | length 64.2
  F.Cu w0.25: U8.8 29.051,24.416 v1(29.591,23.876) ; R8.1@33.147,47.689 33.056,47.598 U1.61 33.056,43.494 v1(33.521,43.029) ; v1(42.866,32.957) 43.957,32.957 U9.1 ; U4.4 48.259,38.609 v1(48.514,38.354)
  B.Cu w0.25: v1(29.591,23.876) 29.736,23.876 30.245,24.385 30.245,31.352 33.243,34.35 33.243,42.751 v1(33.521,43.029) 33.74,43.029 33.902,42.867 42.927,42.867 45.927,39.867 47.636,39.867 48.006,39.497 48.006,38.862 v1(48.514,38.354) ; v1(42.866,32.957) 42.122,33.702 42.122,34.261 42.672,34.811 42.672,35.245 41.127,36.79 39.377,36.79 38.69,37.477 38.69,39.64 40.54,41.489 42.886,41.489 43.596,42.199
I2C1_SDA: R7.1 U1.59 U4.3 U8.9 U9.11 | length 61
  F.Cu w0.25: U8.9 28.041,22.246 v1(28.908,22.246) ; v1(33.782,43.942) 34.056,44.216 U1.59 34.056,46.947 R7.1 ; U9.11 46.224,32.628 46.489,32.893 46.921,32.893 47.516,32.298 48.245,32.298 48.723,32.776 v1(48.921,32.776) ; U4.3 46.934,39.865 v1(47.621,40.552)
  B.Cu w0.25: v1(28.908,22.246) 28.908,24.148 29.691,24.93 29.691,31.363 32.843,34.515 32.843,43.305 33.48,43.942 v1(33.782,43.942) 34.457,43.267 43.093,43.267 46.082,40.278 47.315,40.278 47.621,40.585 v1(47.621,40.552) 48.54,40.552 49.53,39.563 49.53,33.147 49.159,32.776 v1(48.921,32.776)
Indicator_LED: R3.1 U1.62 | length 2.7
  F.Cu w0.25: R3.1@31.496,47.689 32.556,46.629 U1.62
Mag_Data_Ready: U1.41 U9.8 | length 22.6
  F.Cu w0.25: v1(38.354,40.258) 39.564,40.258 39.821,40.001 U1.41 ; U9.8 48.006,29.433 v1(48.006,28.956)
  B.Cu w0.25: v1(38.354,40.258) 37.598,39.502 37.598,37.078 40.426,34.25 40.426,32.726 43.307,29.845 47.553,29.845 48.006,29.392 v1(48.006,28.956)
Net-(C3-Pad1): C3.1 D1.1 U6.5 U7.1 U7.3 | length 13.8
  F.Cu w0.5: C3.1 26.039,13.348 D1.1 29.059,13.598 29.172,13.711 29.172,16.687 U7.1 30.407,16.83 31.026,17.449 31.026,18.123 30.419,18.73 U7.3
Net-(C9-Pad1): C9.1 U1.30 | length 2
  F.Cu w0.25: C9.1 38.056,32.227 U1.30
Net-(C21-Pad1): C21.1 U9.4 | length 3
  F.Cu w0.25: C21.1 43.955,28.943 44.45,28.448 45.212,28.448 U9.4@45.212,29.002
Net-(D2-Pad2): D2.2 U3.2 U3.3 U3.4 U11.3 | length 20.9
  F.Cu w1: D2.2 33.781,24.385 U3.2 34.887,23.741 U11.3
  F.Cu w2: U3.2 34.925,23.241 34.925,17.399 U3.3 35.179,17.653 40.513,17.653 U3.4
Net-(D3-Pad2): D3.2 R4.1 | length 1.5
  F.Cu w0.5: D3.2 47.815,23.318 R4.1
Net-(D4-Pad1): D4.1 JP1.2 | length 2.2
  F.Cu w0.5: JP1.2 30.049,47.916 D4.1
Net-(D4-Pad2): D4.2 R3.2 | length 1.5
  F.Cu w0.5: D4.2 31.7,49.289 R3.2
Net-(J4-Pad3): J4.3 U10.1 | length 7.6
  B.Cu w0.25: U10.1 U10.1@26.67,20.718
  B.Cu w0.35: J4.3 U10.1@26.67,20.718
Net-(JP2-Pad1): JP2.1 R4.2 | length 2.1
  F.Cu w0.5: R4.2 46.278,21.731 JP2.1
Net-(R6-Pad2): R6.2 U11.1 | length 2.8
  F.Cu w0.25: R6.2 30.543,29.909 32.147,28.305 U11.1
OSCI+: C17.1 U1.5 Y1.1 | length 8.9
  F.Cu w0.25: C17.1 25.921,42.804 Y1.1 26.677,43.568 27.051,43.942 27.94,43.942 28.321,43.561 28.321,41.705 28.525,41.501 U1.5
OSCI-: C18.1 U1.6 Y1.3 | length 10.2
  F.Cu w0.25: C18.1 25.4,38.1 24.257,39.243 24.257,40.128 Y1.3 24.377,39.885 25.146,39.116 27.686,39.116 28.448,39.878 28.448,40.894 28.555,41.001 U1.6
Radio_DIO0: U1.15 U10.6 | length 7.1
  F.Cu w0.25: U1.15 30.428,36.501 v1(30.988,35.941)
  B.Cu w0.25: U10.6 27.366,33.622 29.685,35.941 v1(30.988,35.941)
Radio_DIO1: U1.14 U10.7 | length 7.1
  F.Cu w0.25: U1.14 31.213,37.001 v1(31.382,36.831)
  B.Cu w0.25: U10.7 27.261,36.957 31.257,36.957 v1(31.382,36.831)
Radio_DIO2: U1.9 U10.8 | length 7
  F.Cu w0.25: U1.9 30.865,39.501 v1(31.242,39.878)
  B.Cu w0.25: U10.8 30.066,38.702 v1(31.242,39.878)
Radio_DIO3: U1.39 U10.9 | length 7.6
  F.Cu w0.25: v1(39.62,39.357) 39.976,39.001 U1.39
  B.Cu w0.25: v1(39.62,39.357) 44.761,39.357 U10.9
Radio_DIO4: U1.38 U10.10 | length 8.7
  F.Cu w0.25: v1(39.365,38.442) 39.443,38.521 40.961,38.521 U1.38
  B.Cu w0.25: v1(39.365,38.442) 40.74,38.442 43.02,36.162 U10.10
Radio_DIO5: U1.37 U10.11 | length 9.4
  F.Cu w0.25: v1(39.656,37.539) 40.119,38.001 U1.37
  B.Cu w0.25: v1(39.656,37.539) 41.078,37.539 43.141,35.476 43.141,34.591 44.11,33.622 U10.11
Radio_Enable: U1.25 U10.16 | length 19.2
  F.Cu w0.25: U1.25 35.556,33.306 37.039,31.823 v1(37.039,29.955)
  B.Cu w0.25: v1(37.039,29.955) 39.457,29.955 42.741,26.67 42.741,24.671 43.141,24.271 43.141,22.297 44.516,20.922 U10.16
Radio_Reset: U1.33 U10.12 | length 8.4
  F.Cu w0.25: U1.33 40.981,33.657 v1(41.11,33.528)
  B.Cu w0.25: v1(41.11,33.528) 41.021,33.439 41.021,32.766 42.705,31.082 U10.12
Radio_RX: U1.16 U10.5 | length 7.8
  F.Cu w0.25: U1.16 29.631,35.647 v1(30.226,35.052)
  B.Cu w0.25: U10.5 28.278,31.082 30.226,33.03 v1(30.226,35.052)
Radio_SPI1_MISO: U1.22 U10.14 | length 16.3
  F.Cu w0.25: U1.22 34.056,34.846 34.59,35.38 v1(35.324,35.38)
  B.Cu w0.25: v1(35.324,35.38) 35.324,35.219 44.541,26.002 U10.14
Radio_SPI1_MOSI: U1.23 U10.15 | length 17.3
  F.Cu w0.25: U1.23 34.556,33.016 34.729,32.842 v1(34.729,32.385)
  B.Cu w0.25: v1(34.729,32.385) 35.872,31.242 38.735,31.242 43.141,26.836 43.141,24.837 44.516,23.462 U10.15
Radio_SPI1_SCK: U1.21 U10.13 | length 16.6
  F.Cu w0.25: U1.21 33.556,34.912 34.712,36.068 35.593,36.068 v1(36.278,35.383)
  B.Cu w0.25: v1(36.278,35.383) 36.489,35.172 36.489,34.619 42.566,28.542 U10.13
Radio_TX: U1.20 U10.4 | length 13.4
  F.Cu w0.25: v1(32.14,36.259) 33.056,35.343 U1.20
  B.Cu w0.25: U10.4 27.366,28.542 28.829,30.005 28.829,31.067 32.443,34.681 32.443,35.665 32.14,35.968 v1(32.14,36.259)
SYS_JTCK_SWCLK: J6.1 U1.49 | length 4.3
  F.Cu w0.25: J6.1 39.056,48.188 U1.49
SYS_JTMS_SWDIO: J6.2 U1.46 | length 8.4
  F.Cu w0.25: J6.2 39.497,48.265 39.497,42.926 39.922,42.501 U1.46
unconnected-(J3-Pad4): J3.4
unconnected-(U1-Pad1): U1.1
unconnected-(U1-Pad2): U1.2
unconnected-(U1-Pad7): U1.7
unconnected-(U1-Pad8): U1.8
unconnected-(U1-Pad10): U1.10
unconnected-(U1-Pad11): U1.11
unconnected-(U1-Pad26): U1.26
unconnected-(U1-Pad27): U1.27
unconnected-(U1-Pad29): U1.29
unconnected-(U1-Pad34): U1.34
unconnected-(U1-Pad35): U1.35
unconnected-(U1-Pad36): U1.36
unconnected-(U1-Pad42): U1.42
unconnected-(U1-Pad43): U1.43
unconnected-(U1-Pad50): U1.50
unconnected-(U1-Pad55): U1.55
unconnected-(U1-Pad56): U1.56
unconnected-(U1-Pad57): U1.57
unconnected-(U1-Pad60): U1.60
unconnected-(U6-Pad4): U6.4
unconnected-(U7-Pad4): U7.4
unconnected-(U8-Pad1): U8.1
unconnected-(U8-Pad2): U8.2
unconnected-(U8-Pad5): U8.5
unconnected-(U8-Pad13): U8.13
unconnected-(U8-Pad14): U8.14
unconnected-(U9-Pad7): U9.7
unconnected-(U12-Pad6): U12.6
unconnected-(U12-Pad8): U12.8
unconnected-(U12-Pad9): U12.9
unconnected-(U12-Pad11): U12.11
USB_D+: U1.45 U5.3 | length 40.5
  F.Cu w0.2: v1(36.957,41.557) 39.068,41.557 39.487,41.976 40.956,41.976 U1.45
  F.Cu w0.25: v1(33.186,8.357) 33.223,8.321 U5.3
  B.Cu w0.25: v1(33.186,8.357) 33.442,8.357 34.076,8.991 34.076,9.551 34.055,9.572 34.055,36.878 36.449,39.271 36.449,41.049 v1(36.957,41.557)
USB_D-: U1.44 U5.2 | length 40.3
  F.Cu w0.2: v1(35.941,41.529) 36.563,40.907 37.226,40.907 37.526,41.207 39.355,41.207 39.649,41.501 U1.44
  F.Cu w0.25: v1(33.186,9.307) 33.222,9.271 U5.2
  B.Cu w0.25: v1(33.186,9.307) 33.655,9.775 33.655,37.043 35.941,39.329 v1(35.941,41.529)
VBUS: D1.2 J3.1 U5.1 | length 17.4
  F.Cu w0.25: J3.1 34.947,7.09
  F.Cu w0.5: 32.639,7.239 32.387,7.491 32.387,9.638 32.969,10.221 U5.1
  F.Cu w1: D1.2 26.289,9.525 28.507,7.307 34.476,7.307 34.798,6.985

## Polygon pours and split planes (outlines as drawn)
GND on F.Cu "F.Cu-GND" (solid, remove dead copper, pour order 0): 50.038,0 22.098,0 21.971,76.073 50.038,76.073
GND on In2.Cu "In2.Cu-GND" (solid, remove dead copper, pour order 1): 50.038,0 22.098,0 21.971,76.073 50.038,76.073
GND on B.Cu "B.Cu-GND" (solid, remove dead copper, pour order 2): 50.038,0 22.098,0 21.971,76.073 50.038,76.073
+3.3V on In1.Cu "In1.Cu-+3.3V" (solid, remove dead copper, pour order 3): 50.038,76.073 50.038,0 22.098,0 21.971,76.073

## Keep-outs
Edge.Cuts:
  lines w0: 21.971,76.073 50,76.073 50.038,16.002 48.006,14.859 48.006,8.255 50.038,7.239 50.038,0 40.894,0 40.64,0.508 31.877,0.508 31.623,0 22.098,0 21.971,76.073
  lines w0.254: 50,76.073 21.971,76.073 22.098,0 31.623,0 31.877,0.508 40.64,0.508 40.894,0 50.038,0 50.038,7.239 48.006,8.255 48.006,14.859 50.038,16.002

## Silkscreen, mask and mechanical layers (free items; w line width, h text height)
B.SilkS:
  text "Flight Computer V2.1 2023" at 39.201,68.198 h1
  text "Lou Alsteens / Richard Hu / Jakub Jędrzejewski / Benny Liu / Timothy Newman / Václav Pavlícek" at 38.409,53.1 h1
  text "JLCJLCJLCJLC" at 48.751,49.938 h1 r90

## Text inside footprints (layer, text, board x,y; h text height)
J1: F.SilkS "VDD" at 23.127,49.046 h0.5 r90; F.SilkS "GND" at 23.129,46.467 h0.5 r90
J3: F.Fab "PCB Edge" at 40.381,1.5 h0.2
J6: F.SilkS "SWDIO" at 40.151,50.912 h0.5; F.SilkS "SWCLK" at 37.582,50.912 h0.5
U2: Cmts.User "Copyright 2021 Accelerated Designs. All rights reserved." at 45.417,46.708 h0.13 r270; Cmts.User "0.05in/1.27mm" at 46.45,54.341 h1 r270; Cmts.User "0.021in/0.533mm" at 47.085,41.259 h1 r270; Cmts.User "0.287in/7.29mm" at 50.235,47.8 h1 r270; Cmts.User "0.06in/1.513mm" at 40.126,51.445 h1 r270
U12: Cmts.User "Keepout" at 35.106,60.932 h0.4